# Altium PCB pcb big.PcbDoc (part 2 of 5)
Units mil, origin at the board's own origin, x right, y up, seen from the top; angles counter-clockwise.
Board outline 4068 x 10796 mil, 6 copper layers (TopLayer, MidLayer1, MidLayer2, MidLayer3, MidLayer4, BottomLayer); 521 components, 260 nets, 1284 pads, 1180 vias.
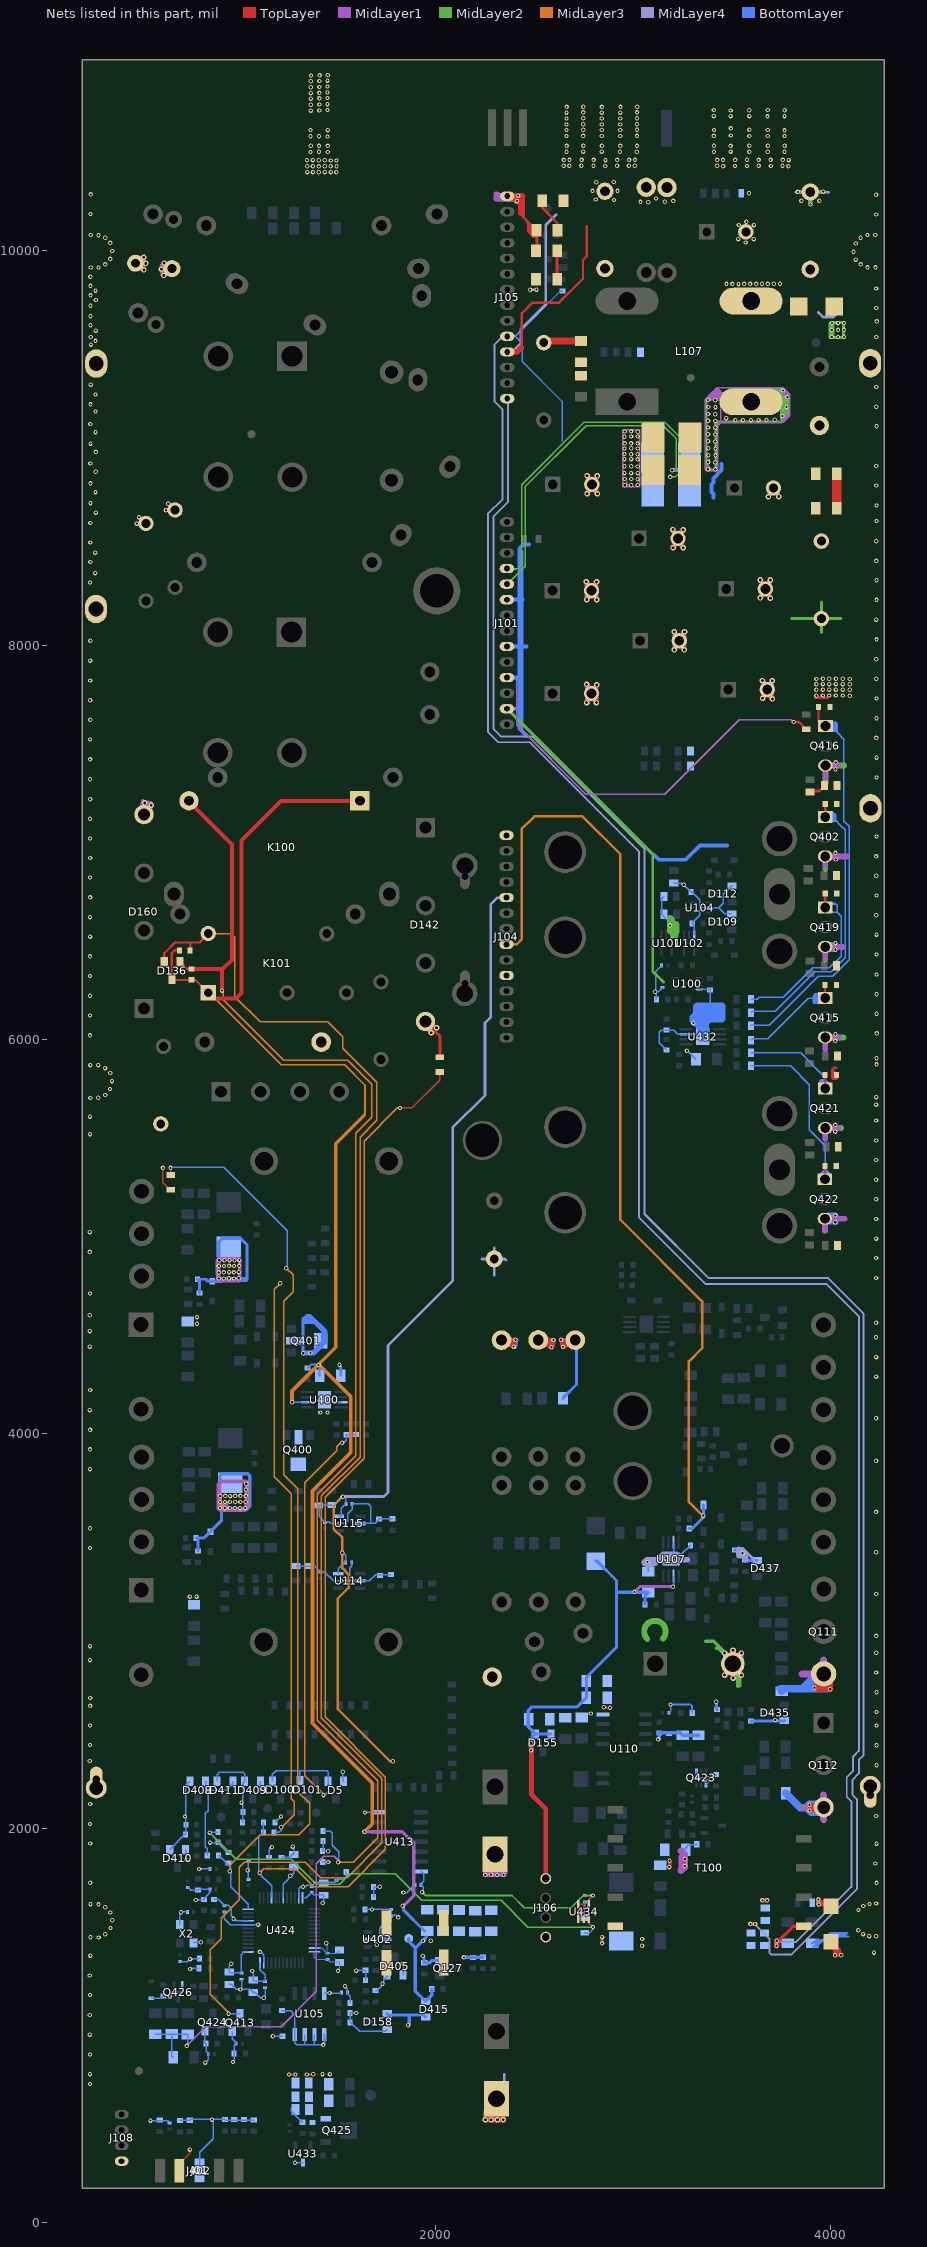
[diagram p6: the nets of this part, all layers, seen from the top]

## Via types
v1: diameter 22, hole 11, TopLayer to BottomLayer, 1101 vias
v2: diameter 28, hole 14, TopLayer to BottomLayer, 79 vias

## Nets (pads, with @x,y where several pads share a name; then routed paths per layer and width w, separated by ;. In a path a pad name is that pad's centre, name@x,y a point inside that pad or via, vN(x,y) a via of type N, cw(c..) or ccw(c..) an arc to the next point about the centre after c; other vN are vias at no path point) (continued)
UnNamedNet7: C101.1 C106.2 C107.1 C112.2 C115.1 C118.2 C122.1 C126.1 C130.1 C139.2 C150.2 C180.2 C213.2 C224.2 C225.2 C226.2 C228.2 C229.2 C230.2 C231.2 C234.2 C508.1 C527.2 C536.2 C537.2 C545.2 C582.2 C583.2 C585.2 C590.2 C5290.2 D109.1 D112.1 J101.2 J101.4 J101.6 J101.9 J101.11 J105.5 Q402.3 Q415.3 Q416.3 Q419.3 Q421.3 Q422.3 R107.2 R117.2 R129.1 R503.2 R504.2 R505.2 R506.2 R507.1 R508.1 R524.2 R525.2 R534.1 R5000.1 RT403.2 T100.6 U100.4 U101.3 U102.3 U104.2 U432.3 U432.9 | length 30269.2
  TopLayer w12: v2(3687,8753) 3687,8773 C228.2@3712,8798 3739,8771 v2(3739,8754) ; v1(3815,7611) 3842,7611 3871,7582 3871,7581 RT403.2@3878,7574 ; v1@3925,7736 3928,7733 3984,7733 v1@3990,7739 ; 4017,5808 4017,5833 4021,5837 ; 4032,5856 4021,5856 4011,5846 4011,5806 4016,5801 4034,5801
  TopLayer w16: v1(3729,1428) 3740,1428 3814,1502 T100.6@3865,1502
  TopLayer w22: v1(3656,1633) v1(3681,1633)
  TopLayer w28: v2(2763,8322) v2(2816,8231) ; v2(2764,7709) v2(2816,7799) ; v2(2764,7801) v2(2814,7709) ; v2(2765,8232) v2(2815,8321) ; v2(2767,8769) v2(2818,8859) ; v2(2767,8860) v2(2819,8768) ; v2(3202,8587) v2(3255,8495) ; v2(3203,8495) v2(3254,8586) ; v2(3209,7976) v2(3261,8068) ; v2(3209,8068) v2(3260,7976) ; v2(3645,8240) v2(3697,8331) ; v2(3645,8331) v2(3697,8239) ; v2(3656,7821) v2(3707,7728) ; v2(3657,7731) v2(3706,7820) ; v1@3729,1404 v1(3729,1428)
  MidLayer1 w7: J101.4@2360,7836 2395,7836 2409,7822 2409,7596 2760,7245 3161,7245 3539,7623 3803,7623 v1(3815,7611) ; 2968,8832 2968,8820 v1@2983,8805 ; v1@2983,8805 2949,8805 2948,8806 2948,9093 2949,9094 2953,9094 3031,9094 3035,9090 3035,8807 3033,8805 v1@2983,8805
  MidLayer1 w18: v2@2763,8234 v2(2763,8322) ; v2(2764,7709) v2(2764,7801) ; v2@2815,8232 v2(2815,8321) ; v2@2816,7711 v2(2816,7799) ; v2(2818,8859) v2(2767,8769) 2787,8829 v2(2767,8860) v2(2819,8768) ; v2(3209,7976) v2(3209,8068) ; v2@3261,7977 v2(3261,8068) ; v2(3645,8240) v2(3697,8331) ; v2(3645,8331) v2(3697,8239) ; v2(3656,7821) C229.2@3681,7775 v2(3657,7731) ; v2(3687,8753) C228.2@3712,8798 v2(3739,8754) ; v2(3706,7820) 3706,7800 3692,7786 3692,7743 v2(3707,7728)
  MidLayer1 w20: v2(3202,8587) v2(3255,8495) ; v2(3203,8495) v2(3254,8586)
  MidLayer1 w30: 3973,5030 Q422.3@3973,5091 4073,5091 ; 3975,5498 Q421.3@3975,5551 4043,5551 ; 3975,5952 Q415.3@3975,6011 4042,6011 ; 3975,6412 Q419.3@3975,6470 4061,6470 ; 3975,6882 Q402.3@3975,6929 4085,6929 ; 3976,7332 Q416.3@3976,7390 4039,7390
  MidLayer2 w8: J101.11@2360,8389 2362,8387 2411,8387 2435,8411 2435,8814 2753,9132 3161,9132 3238,9055 3238,8878 3214,8854 v1(3189,8854)
  MidLayer2 w14: J101.2@2362,7678 3100,6940 3100,6429 3100,6346 3155,6291
  MidLayer2 w15: J101.2@2360,7678 J101.2@2362,7678 ; 3805,8135 C180.2@3955,8135 ; 3955,8066 C180.2@3955,8135 ; 3955,8220 C180.2@3955,8135 ; 4055,8135 C180.2@3955,8135
  MidLayer2 w30: 3215,6524 3188,6551 3188,6617 3198,6607 3198,6569 3221,6546 3221,6583.23 3218.23,6586 ; 3973,5030 Q422.3@3973,5091 4033,5091 ; 3975,5498 Q421.3@3975,5551 4055,5551 ; 3975,5954 Q415.3@3975,6011 4068,6011 ; 3975,6407 Q419.3@3975,6470 4056,6470 ; 3975,6864 Q402.3@3975,6929 4045,6929 ; 3976,7298 Q416.3@3976,7390 4070,7390
  MidLayer3 w18: v2(2763,8322) v2(2816,8231) ; v2(2764,7709) v2(2816,7799) ; v2(2764,7801) v2(2814,7709) ; v2(2765,8232) v2(2815,8321) ; v2(2767,8769) v2(2818,8859) ; v2(2767,8860) v2(2819,8768) ; v2(3202,8587) v2(3255,8495) ; v2(3203,8495) v2(3254,8586) ; v2(3209,7976) v2(3261,8068) ; v2(3209,8068) v2(3260,7976) ; v2(3645,8240) v2(3697,8331) ; v2(3645,8331) v2(3697,8239) ; v2(3656,7821) v2(3707,7728) ; v2(3657,7731) v2(3706,7820) ; v2(3687,8753) 3718,8806 v2(3739,8754)
  MidLayer4 w10: J105.5@2362,9567 2339,9567 2298,9526 2298,9236 2337,9197 2337,8739 2264,8666 2264,7561 2317,7508 2475,7508 3031,6952 3031,5096 3368,4759 3982,4759 4145,4596 4145,2392 4116,2363 4116,2290 4084,2258 4084,2159 4107,2136 4107,1702 3826,1421 3736,1421 v1(3729,1428) 3729,1404 v1(3728,1403) ; v1(3656,1633) v1(3681,1633)
  BottomLayer w7: R107.2@2632,9797 R107.2@2643,9797 ; C536.2@3169,5946 3169,5947 3133,5983 3133,6036 3143,6046 3207,6046 3225.82,6027.18 U432.3@3268,6027.18 U432.9@3332.18,6027.18 ; C150.2@3207,6794 3247,6794 3292,6749 3297,6749 3338,6708 3338,6631 3300,6593 C130.1@3300,6589 3310,6579 U102.3@3310,6532 ; v1(3273,5943) 3275,5943 3318,5900 C508.1@3319,5900 ; U100.4@3337,6253.94 3389.06,6253.94 R117.2@3391,6252 3391,6142 ; 3340,6669 U104.2@3378,6669 3434,6669 ; D109.1@3501,6637 3466,6637 3434,6669 ; D112.1@3502,6779 3500,6779 3458,6737 3458,6692 3435,6669 3434,6669
  BottomLayer w8: R107.2@2632,9797 2405,9570 2365,9570 J105.5@2362,9567 2403,9567 2438,9532 2438,9439 2640,9237 2640,9153 2640,9034 ; R129.1@3118,6204 3117,6205 3117,6238 v1(3113,6242) ; C107.1@3145,6376 3145,6375 3116,6346 3116,6245 v1(3113,6242) ; C112.2@3150,6265 3150,6263 3129,6242 v1(3113,6242) ; C122.1@3156,6725 3145,6714 3145,6634 3187,6592 v1(3187,6579) 3196,6570 U101.3@3196,6533
  BottomLayer w20: J101.2@2360,7678 2435.38,7678 ; J101.4@2360,7836 2425,7836 ; J101.6@2360,7994 2460,7994 ; J101.9@2360,8231 2439.5,8231 ; 2435,7582 2435,8475 ; 2462,7540 2424,7578 2424,8490 2445,8511 2472,8511 ; 3107,6937 3132,6912 3267,6912 3339,6984 3476,6984
  BottomLayer w30: U432.9@3353,6015 3343,6025 3343,6057 3311,6089 3308,6089 3302,6095 3302,6113 3320,6131 3320,6168 3324,6172 3452,6172 3454,6170 3454,6105 3450,6101 3388,6101 3369,6082 3369,6022 3357,6010 3357,6062 3326,6093 3326,6103 3346,6123 3346,6156 3354,6148 3439,6148 3439,6126 3423,6142 3379,6142 3344,6107 3344,6104 3348,6100 3348,6088 3368,6108 3373,6108 3385,6120 3451,6120 ; Q419.3@3975,6470 3985,6480 4021,6480 4024,6483 4024,6459 4023,6458 3984,6458 Q419.3@3983,6459 ; Q422.3@4003,5089 4006,5089 4018,5077 4024,5077 4023,5076 3976,5076 3975,5077 3975,5094 3989,5108 v1(4026,5108) v1(4026,5073)
  other v1: 4026,5533 4026,5567 4026,5993 4027,6027 3306,6083 4027,6455 4027,6489 3257,6785 4028,6913 4027,6947 4027,7371 4028,7406 3930,7744 4099,7744 3963,7745 3995,7745 4029,7745 4064,7745 3930,7774 4099,7774 3963,7775 3995,7775 4029,7775 4064,7775 3930,7802 4099,7802 3963,7803 3995,7803 4029,7803 4064,7803 3930,7829 4099,7829 3963,7830 3995,7830 4029,7830 4064,7830 2958,8812 2991,8812 3024,8813 3023,8842 2958,8843 2991,8843 2957,8873 2990,8873 3024,8873 3024,8907 2957,8908 2991,8908 3023,8943 2957,8944 2990,8944 2990,8969 3023,8969 2957,8970 2957,8998 3024,8998 2991,8999 2958,9024 2990,9024 3023,9024 2957,9058 2990,9059 3023,9059 3024,9083 2958,9084 2990,9085
UnNamedNet8: C1.2 C2.2 C53B.2 C100.1 C102.1 C105.1 C108.2 C110.2 C116.2 C119.2 C121.1 C123.2 C124.2 C125.1 C127.2 C132.1 C134.1 C141.2 C143.1 C144.1 C148.1 C149.2 C151.1 C152.1 C153.1 C154.2 C155.1 C157.1 C160.2 C167.2 C169.2 C170.1 C184.1 C185.1 C210.1 C211.1 C212.1 C215.1 C239.2 C250.2 C251.2 C255.1 C256.1 C400.1 C401.1 C402.1 C403.1 C404.2 C405.2 C406.1 C410.2 C411.2 C412.1 C417.2 C420.1 C422.1 C423.1 C424.1 C425.2 C426.1 C427.1 C428.1 C429.1 C436.2 C437.2 C448.1 C454.2 C456.1 C458.1 C459.1 C510.1 C511.1 C534.1 C535.2 C540.2 C541.2 C549.1 C550.2 C552.1 C554.2 C555.1 C1250.2 C4330.1 C5480.1 C5560.2 CAP1.2 CAP2.2 D5.1 D100.1 D101.1 D111.2 D137.2 D142.4 D158.1 D160.4 D405.1 D408.1 D409.1 D410.1 D411.1 D415.1 D432.2 D433.2 D435.2 D437.2 D438.2 J104.5 J104.7 J104.14 J106.4 J402.4 Q111.3 Q112.3 Q127.2 Q400.2 Q400.4 Q401.2 Q401.4 Q413.2 Q423.1 Q423.4 Q424.2 Q426.2 R5.2 R101.1 R128.1 R135.1 R137.2 R138.2 R151.1 R153.2 R154.1 R156.1 R160.2 R167.1 R182.1 R193.1 R196.1 R242.1 R243.1 R244.2 R245.2 R427.2 R441.1 R442.2 R443.2 R444.2 R456.1 R469.1 R491.2 R538.1 R545.1 R549.2 R550.1 R559.2 R572.2 R1580.1 R1860.1 R2650.1 RT401.2 RT402.1 T100.5 U105.1 U105.2 U105.3 U105.4 U107.3 U107.9 U110.12 U114.2 U115.2 U400.3 U400.9 U402.2 U413.7 U424.8 U424.23 U424.35 U424.47 U433.3 U434.1 U434.2 U434.5 X2.2 X2.4 | length 38739.5
  TopLayer w8: v1(615,5349) 615,5273 650,5238 RT401.2@654,5238 ; J402.4@698,261 698,297 752,351 v1(752,369) ; v1(1255,750) v1(1288,750) ; U434.1@2723,1540 U434.5@2723,1613 2745,1613 2749,1609 U434.2@2749,1540
  TopLayer w12: v1(2851,2613) 2854,2610 v1(2883,2610)
  TopLayer w15: D142.4@1940,6087 1940,6081 1975,6046 v2@1975,6040 ; v2@1992,6063 1964,6091 D142.4@1947,6091 2020,6018 RT402.1@2020,5910 ; v2@2000,6065 v2@1975,6040 ; v2(2003,6060) 2003,6050 1987,6034 v2(1976,6034) 1970,6040 v2@1975,6040
  TopLayer w18: v1@3185,1803 v1(3185,1834) ; 3899,2102 Q112.3@3959,2102 ; v1(3895,2089) 3951,2089 Q112.3@3967,2105 3954,2118 v1(3895,2118) v1(3895,2089)
  TopLayer w22: v2(523,7200) D160.4@519,7141 v2(556,7189) ; D160.4@535,7175 D160.4@535,7186 ; 2382,4459 v1(2403,4477) ; C134.1@2519,4476 v1(2596,4476) v1(2586,4439) 2519,4472 2579,4460 ; C102.1@2660,4463 v1(2635,4477) ; v1(2403,4477) v1(2394,4442) C105.1@2333,4475 v1(2403,4477) ; v1(2635,4477) v1(2645,4440) C102.1@2707,4475 v1(2635,4477)
  TopLayer w28: v2(2251,520) v2(2341,520) 2328,621 2252,524 2275,631 2277,537 2319,538 2287,634 CAP2.2@2290,544 ; v2(3464,2776) v2(3550,2888) ; v2(3464,2888) v2(3550,2775) ; v2(3507,2902) v2(3508,2761) ; 3951,2714 3951,2775 3955,2779 3955,2775 3984,2746 3984,2723 3983,2722 3977,2722 3966,2733 Q111.3@3966,2743 ; Q111.3@3952,2787 3929,2764 3929,2713 3938,2704 v1(4000,2704) 4000,2749 Q111.3@3967,2782
  MidLayer1 w20: v2@532,7191 v2(523,7200) 519,7152 555,7199 514,7209 504,7152 526,7131 v2(556,7189) ; v1(930,3654) 945,3614 ; D142.4@1944,6096 1960,6096 1996,6060 v2(2003,6060) ; D142.4@1952,6092 1952,6060 1976,6036 v2(1976,6034) ; v1(2250,1762) 2347,1761 2352,1775 2334,1889 2265,1889 2251,1768 2258,1889 2266,1781 2340,1778 2278,1776 ; v2(2251,520) v2(2341,520) 2340,651 2257,528 2263,617 2314,636 2324,533 2264,544 2280,529 CAP2.2@2318,573 ; CAP1.2@2304,1794 CAP1.2@2306,1877 ; 2386,4460 2372,4468 2403,4471 2392,4443 2327,4485 v1(2403,4477) ; 2591,4451 2553,4468 2596,4469 2583,4440 2511,4485 v1(2596,4476) ; v1(2635,4477) 2706,4479 2649,4441 v1@2636,4474 ; v1(2645,4440) v1@2636,4474 ; 2658,4458 2667,4470 v1@2636,4474 ; v2(3464,2776) v2(3550,2888) ; v2@3470,2883 v2(3550,2775) ; v2(3507,2902) v2(3508,2761) ; 945,3614 902,3615 896,3622 896,3743 910,3757 1035,3756 1039,3749 1039,3622 1028,3614 945,3614 ; 893,4831 894,4780 896,4775 1002,4777 1005,4782 1005,4879 999,4886 898,4886 893,4877 893,4831
  MidLayer1 w35: 3857,2782 Q111.3@3967,2782 ; 3885,2105 Q112.3@3967,2105 ; 3967,2046 Q112.3@3967,2105 ; 3967,2166.97 Q112.3@3967,2105 ; 3967,2709 Q111.3@3967,2782 ; 3967,2852 Q111.3@3967,2782
  MidLayer2 w18: 3370,2948 3410,2948 3542,2816 3542,2721 ; 3422,2912 3433,2912 3530,2815 3530,2719
  MidLayer2 w30: 3072,2959 cw(c3111,2997) 3152.4,2961.63
  MidLayer3 w7: v1(1210,4764) 1210,4761 1181,4732 1181,3782 1266,3697 1266,2149 1281,2134 1281,2067 1218,2004 v1(1215,2004) ; v1(1430,2167) 1430,2171 1335,2266 1335,3752 1497,3914 1497,3934 1518,3955 v1(1524,3955)
  MidLayer3 w13: J104.7@2358,6483 2410,6483 2435,6508 2435,7068 2499,7132 2743,7132 2935,6940 2935,5086 3350,4671 3350,4434 3283,4367 3283,3654 3352,3585 v1(3356,3585)
  MidLayer3 w18: D160.4@523,7145 v2(523,7200) ; D160.4@530,7156 556,7182 v2(556,7189) ; v1(906,3685) 906,3649 940,3615 ; D142.4@1963,6061 1964,6060 D142.4@1978,6060 ; v2(2003,6060) D142.4@1978,6060 ; CAP1.2@2249,1849 v1(2250,1762) v1(2343,1763) 2321,1849 2259,1770 2329,1778 2317,1834 2290,1786 CAP1.2@2265,1786 ; CAP2.2@2305,614 2276,549 2328,547 2337,533 2256,532 2299,633 2254,612 v2(2251,520) v2(2341,520) 2343,617 CAP2.2@2307,627 ; 2395,4456 2373,4466 v1(2403,4477) ; 2580,4457 2550,4466 v1(2596,4476) ; 2653,4457 2670,4465 v1(2635,4477) ; v2(3464,2888) v2(3550,2775) ; 940,3615 914,3615 903,3626 903,3754 909,3760 1036,3760 1043,3753 1043,3625 1033,3615 940,3615 ; D142.4@1978,6060 1976,6058 v2(1976,6034) 1947,6063 D142.4@1947,6091 D142.4@1978,6060 ; v1(2403,4477) 2393,4443 2331,4478 v1(2403,4477) ; v1(2596,4476) v1(2586,4439) C134.1@2519,4476 v1(2596,4476) ; v1(2635,4477) v1(2645,4440) C102.1@2707,4475 v1(2635,4477)
  MidLayer3 w28: 3871,2105 Q112.3@3967,2105 3967,2039 ; 3875,2782 Q111.3@3967,2782 ; 3967,2709 Q111.3@3967,2782 ; 3967,2849 Q111.3@3967,2782
  MidLayer4 w14: 2234,4887 C417.2@2296,4887 ; 2296,4805 C417.2@2296,4887 ; 2296,4943.99 C417.2@2296,4887 ; CAP2.2@2313,695 2260,695 2255,700 2255,687 2268,674 2268,684 2266,682 2266,561 2268,563 CAP2.2@2347,563 ; CAP2.2@2323,659 2347,683 2347,751 ; 2355,4881 2349,4887 C417.2@2296,4887 ; 3551.98,3419.98 3555,3419.98 3615,3359.98 3615,3351
  MidLayer4 w30: 3162,3347 3163,3348 3218,3348 3229,3359 3229,3377 3219,3387 3153,3387 3107,3341 3097,3341 3095,3339 3065,3339 3059,3345 3059,3349 3071,3361 3275,3361 ; 3552,3382 3538,3382 3538,3413 3569,3382 3569,3363
  BottomLayer w6: U424.35@1384,1392.15 1419.85,1392.15 1446,1366 1496,1366 C552.1@1511,1381 ; v1(1444,1416) 1450,1410 C549.1@1450,1365
  BottomLayer w7: v1(552,516) 640,516 649,507 C427.1@649,505 ; D438.2@556,1136 606,1136 R572.2@619,1149 645,1149 v1(649,1145) 672,1168 705,1168 713,1176 Q426.2@713,1203 ; D410.1@650,1891 732,1973 732,2217 D408.1@752,2237 ; X2.4@701,1510 701,1567 709,1575 C555.1@739,1575 ; C554.2@703,1323 739,1323 752,1336 798,1336 C412.1@800,1338 ; C405.2@741,1699 743,1699 757,1685 R427.2@793,1685 797,1689 852,1689 C400.1@853,1688 853,1671 819,1637 784,1637 v1(782,1635) ; X2.2@770,1417 774,1421 v1(807,1421) ; v1(799,1792) 800,1793 C401.1@854,1793 ; Q424.2@828,971 828,912 835,905 835,868 845,858 C534.1@845,853 845,824 831,810 v1(830,810) ; v1(854,1926) 893,1926 942,1877 C426.1@948,1877 ; D411.1@890,2237 890,2271 902,2283 1021,2283 1029,2275 1029,2238 1019,2228 1019,2085 C211.1@1022,2082 1019,2079 R167.1@1019,2028 ; C5560.2@928,1575 927,1574 927,1540 957.2,1509.8 U424.8@1048,1509.8 1097.8,1509.8 v1(1098,1510) ; C541.2@952,1207 963,1207 988,1182 1058,1182 C540.2@1074,1166 1081,1166 1108,1139 v1(1127,1139) 1133,1145 1133,1189 C550.2@1132,1190 ; Q413.2@967,968 967,931 987,911 C4330.1@987,908 977,898 977,819 v1(971,813) ; v1(1008,1181) 1014,1187 C53B.2@1014,1233 ; C424.1@1049,1740 1049,1831 C425.2@1050,1832 ; v1(1107,1372) 1112,1372 1126.69,1357.31 U424.47@1126.69,1316 ; C511.1@1154,1851 1155,1852 1155,1893 1165,1903 v1(1168,1903) ; D100.1@1171,2238 1171,2272 1189,2290 1447,2290 1454,2283 1454,2184 1437,2167 v1(1430,2167) ; C108.2@1179,1978 1203,1978 1215,1990 v1(1215,2004) ; C510.1@1217,1851 1258,1851 1280,1873 1280,1900 v1(1274,1906) ; R559.2@1219,1074 1263,1074 1285,1052 1285,953 U105.4@1284,952 1284,910 1293,901 1428,901 v1(1429,900) v1@1434,905 ; 1267,582 1267,564 1323,508 R550.1@1324,508 ; v1(1285,302) 1286,303 U433.3@1326,303 ; R242.1@1291,3329 1292,3328 1385,3328 C255.1@1415,3298 1437,3298 1481,3254 1662,3254 1694,3286 R182.1@1772,3286 ; U424.23@1303.85,1646 1303.85,1691.85 1314,1702 1337,1702 1344,1709 1365,1709 C5480.1@1370,1704 1370,1706 1389,1725 1434,1725 1486,1725 1501,1740 1531,1740 1545,1754 R441.1@1545,1778 ; D101.1@1310,2240 1310,2290 ; 1334,901 U105.3@1334,952 ; 1384,901 U105.2@1384,952 ; R549.2@1428,1935 1428,1888 C1250.2@1424,1884 1452,1884 v1(1454,1882) ; R245.2@1472,3639 1470,3637 R244.2@1406,3637 1407,3636 1407,3582 1437,3552 C256.1@1437,3551 1439,3553 1459,3553 1465,3547 1539,3547 1552,3560 1552,3595 1575,3618 C250.2@1575,3645 1657,3645 1669,3633 1669,3546 1670,3545 ; v1(1524,3955) 1532,3955 1545,3968 C410.2@1545,3995 1593,3995 C411.2@1595,3997 ; v1(1539,1198) 1551,1186 1551,1161 1565,1147 R153.2@1565,1113 ; 1562,3259 1562,3319 1573,3330 C251.2@1573,3348 ; v1@1598,1279 C454.2@1643,1279 C437.2@1643,1228 ; U115.2@1617,3545 1691,3545 1714,3568 1779,3568 R135.1@1780,3569 ; v1(1640,2079) 1641,2080 U413.7@1710,2080 ; R444.2@1641,1587 1771,1587 C459.1@1772,1586 ; U402.2@1655,1435 1678,1435 1700,1413 v1(1700,1408) ; R442.2@1684,1651 R443.2@1684,1701 1714,1701 v1(1715,1702) ; v1(1830,1313) 1835,1308 1835,1258 D405.1@1832,1255 ; v1(1835,1673) 1851,1673 1889,1711 C403.1@1893,1711 ; v1(3074,3350) 3077,3347 C170.1@3077,3301 ; U107.3@3205.18,3450 3205.18,3377.18 U107.9@3193,3365 3220,3392 3248,3392 3289,3433 R193.1@3292,3433
  BottomLayer w8: R101.1@2755,1543 2755,1576 v1(2749,1582) 2756,1589 2756,1625 C116.2@2757,1626 ; C119.2@3182,2585 3192,2595 3192,2625 v1(3190,2627) 3293,2627 3299,2621 3299,2585 R491.2@3300,2584 ; Q423.1@3321,2290 3321,2260 3326,2255 3384,2255 v1@3387,2252 ; Q423.4@3371,2219 3371,2221 3383,2233 3383,2251 3403,2271 R538.1@3421,2271
  BottomLayer w9: U400.9@1459.18,4160.82 U400.3@1520,4160.82
  BottomLayer w10: v1@1434,905 U105.1@1434,952
  BottomLayer w11: v1(1511,4350) 1517,4344 1517,4296 C239.2@1518,4295
  BottomLayer w12: D160.4@519,7141 526,7141 D160.4@530,7145 ; v2(523,7200) 523,7152 D160.4@530,7145 ; v2(556,7189) 556,7171 D160.4@530,7145
  BottomLayer w15: R154.1@800,4714 800,4774 C167.2@790,4784 832,4784 842,4774 D432.2@865,4774
  BottomLayer w16: R156.1@793,3405 793,3462 C169.2@783,3472 825,3472 912,3559 912,3616 905,3623 905,3789 913,3797 1047,3797 1056,3788 1056,3633 1043,3620 918,3620 ; D432.2@865,4774 909,4774 912,4777 1036,4777 1042,4783 1042,4958 1008,4992 915,4992 898,4975 v1@898,4783 ; v1@905,4787 1030,4787 ; Q401.2@1278,4472 1309,4472 1325,4456 ; Q401.2@1312,4471 1312,4479 1319,4486 ; 1332,4565 1376,4565 ; v1@1333,4414 1376,4414 1426,4464 1426,4522 1373,4575 1373,4580 1367,4574 1345,4574 ; 1336,4575 1336,4579 1343,4586 1360,4586 ; D158.1@1753,1058 1759,1052 1937,1052 D415.1@1948,1041 ; v1(1859,1000) 1865,1006 1865,1052 ; v1(1933,1351) 1939,1345 1939,1319 R2650.1@1941,1317 1969,1317 1981,1329 Q127.2@2019,1329 ; D142.4@1982,6064 1976,6058 v2@1976,6039 ; v2(2003,6060) v2@1997,6060 ; v1(2142,1344) 2143,1345 R128.1@2239,1345 ; C105.1@2333,4475 2336,4486 2411,4479 2403,4437 2369,4453 2333,4472 2396,4469 2396,4451 2366,4466 2389,4464 ; v1@2592,4467 2535,4472 2538,4465 2586,4450 2602,4478 2592,4436 2568,4448 2540,4451 2520,4474 C134.1@2539,4486 ; R5.2@2645,4180 2645,4182 2713,4250 2713,4469 C102.1@2707,4475 2694,4462 v1(2645,4440) ; C102.1@2669,4468 2651,4465 2649,4455 2686,4469 2647,4442 v1(2635,4477) C102.1@2705,4477 ; C110.2@3285,3519 3299,3519 3358,3578 D137.2@3358,3639 ; v1(3422,2641) 3424,2639 3424,2603 C157.1@3426,2601 ; C155.1@3516,3410 3540,3410 3569,3381 R1580.1@3569,3359 3571,3357 D437.2@3629,3357 ; R160.2@3599,2543 3765,2543 D435.2@3767,2545 ; 1325,4456 1325,4581 1344,4600 1364,4600 1442,4522 1442,4463 1384,4405 1329,4405 1325,4409 1325,4456 ; v2@1976,6039 v2@1997,6060 ; v2@1976,6039 v2(1976,6034) 1947,6063 D142.4@1947,6091 1950,6094 1963,6094 v2@1997,6060 ; C134.1@2539,4486 v1(2596,4476) C134.1@2539,4486
  BottomLayer w18: v1(3127,2450) 3133,2456 C535.2@3133,2483 3240,2483 R1860.1@3252,2471 3331,2471 R151.1@3332,2470 ; v2(3464,2776) 3550,2862 v2(3550,2888) ; v2(3464,2888) 3464,2861 v2(3550,2775) ; v2(3507,2902) 3507,2762 v2(3508,2761)
  BottomLayer w38: C154.2@3754,2694 3754,2700 3747,2707 3858,2707 3940,2789 Q111.3@3981,2789 ; C160.2@3775,2177 3848,2104 3963,2104 Q112.3@3968,2099 ; 3845,2707 3986,2707 3994,2715 3994,2772 3991,2775 3958,2775 3915,2732 3964,2732 3970,2726 Q111.3@3970,2748 ; 3863,2104 3880,2104 3904,2080 Q112.3@3956,2080 ; v1@3892,2119 3895,2122 3953,2122 3966,2109 3966,2108 3969,2105 Q112.3@3967,2105
  other v1: 1425,752 1462,752 1596,1277 753,1335 3046,1403 3046,1437 707,1573 1676,1587 1326,1702 2310,1762 2280,1763 1045,1786 3184,1802 727,2059 1014,2129 3379,2254 3721,2548 2785,2581 3920,2712 752,3174 786,3174 1520,3254 3167,3367 3215,3367 3556,3394 1512,3545 929,3623 1006,3623 1033,3623 905,3624 955,3624 981,3624 905,3654 955,3654 982,3654 1008,3654 1035,3654 956,3684 931,3685 982,3685 1008,3685 1036,3685 1037,3716 1038,3747 1414,4108 1450,4108 1327,4409 1363,4410 788,4558 788,4592 898,4788 924,4788 975,4788 950,4789 1000,4789 898,4819 924,4819 975,4819 950,4820 1000,4820 899,4851 925,4851 976,4851 951,4852 1001,4852 901,4880 927,4880 978,4880 953,4881 1003,4881
  other v2: 2280,520 2312,520
UnNamedNet9: C426.2 R170.2 RT401.1 U424.12 | length 4724.9
  TopLayer w8: v1(654,5349) 655,5349 RT401.1@655,5312
  MidLayer3 w7: v1(954,1781) 954,1811 1108,1965 1304,1965 1360,2021 1360,2125 1300,2185 1300,3720 1228,3792 1228,4673 1276,4721 1276,4806 1242,4840 v1(1241,4840)
  BottomLayer w7: v1(654,5349) 658,5353 924,5353 1246,5031 1246,4845 v1(1241,4840) ; R170.2@898,1861 899,1861 958,1802 958,1703 1048,1613 U424.12@1048,1588.54
UnNamedNet10: C108.1 R104.1 RT402.2 U424.16 | length 5535.7
  TopLayer w8: v1(1818,5653) 1878,5653 2019,5794 2019,5835 RT402.2@2020,5836
  MidLayer3 w7: v1(1106,1773) 1107,1773 1127,1793 1289,1793 1379,1703 1555,1703 1744,1892 1744,2259 1439,2564 1439,3679 1636,3876 1636,5485 1804,5653 v1(1818,5653)
  BottomLayer w7: R104.1@1126,2029 1125,2028 1125,1979 1102,1956 1102,1772 1166.06,1707.94 U424.16@1166.06,1646
UnNamedNet11: C135.2 C136.2 C180.1 C181.1 C193.1 C204.1 C205.1 C206.2 C207.2 C208.2 C223.1 C242.1 C245.1 C300.1 HS2.1 J001.1 J001.2 J003.1 J003.2 J007.1 J008.1 J009.1 J105.14 | length 4812.4
  TopLayer w12: J105.14@2362,10278 ccw(c2388.56,10278) 2369.78,10259.22 ccw(c2370.31,10259.76) J105.14@2370.31,10259 ; J105.14@2367,10272 2436,10272 2438,10270 ; J105.14@2372,10258 2401,10258 2422,10237 2422,10193 2446,10169 ; v1@2421,10257 2414,10264 2408,10264 2424,10248 2424,10246 ; 2432,10187 2432,10258 2422,10268 2370,10268 2435,10268 2441,10262 2441,10180 ; 2446,10280 2446,10169 ; 2452.96,10162.04 cw(c2419.06,10128.14) 2467,10128.14 2467,10101 2497,10071 2512,10071 ; 2470,10135 2470,10128 2501,10097 2501,10079 2505,10075 2504,10075 2475,10104 2475,10116 2499,10092 C193.1@2499,10088 ; C193.1@2510,10105 2446,10169 ; HS2.1@4172,9472 4172,9467 4166,9461 4166,9395 4174,9387 HS2.1@4174,9378
  TopLayer w16: J105.14@2362,10278 2369,10285 2441,10285 2446,10280 ; C223.1@2508,10002 2512,10006 2512,10103 C193.1@2510,10105
  TopLayer w22: v2@516,9957 517,9925 v2(519,9904) C300.1@476,9938 ; v2(518,9968) C300.1@476,9938 ; v2(621,9939) C207.2@661.31,9910.57 ; v2@622,9929 623,9900 v2(619,9876) C207.2@661.31,9910.57 ; C300.1@476,9938 v2(528,9937) C300.1@476,9938 ; C207.2@661.31,9910.57 v2(608,9907) C207.2@661.31,9910.57
  TopLayer w35: C181.1@2547,9535 2555,9543 C242.1@2736,9543
  MidLayer1 w20: C300.1@476,9938 v2(519,9904) ; v1(482,8617) C205.1@529,8618 v1(494,8649) ; v2(518,9968) 472,9940 v2@529,9938 ; v2(621,9939) 609,9923 612,9879 628,9923 617,9883 C207.2@658,9910 ; v1(630,8685) 683,8678 v1(642,8718) ; 2312,10276 2319,10269 J105.14@2389,10269 ; 2404,10267 2384,10267 2378,10261 2340,10261 2337,10264 2302,10264 2302,10290 2304,10292 2310,10292 2320,10282 2416,10282 v1(2417,10281) ; v1@2411,10250 2411,10252 2403,10260 2403,10265 2414,10276 2414,10262 v1@2411,10259
  MidLayer4 w20: v1(494,8649) C205.1@529,8618 ; v1(630,8685) 677,8695 v1(642,8718) ; J105.14@2370,10277 2364,10283 2319,10283 2312,10290 2310,10290 2304,10284 2304,10265 2307,10262 2396,10262 2407,10251 2413,10251 2419,10257 2419,10278 2415,10282 2366,10282 2360,10276 2315,10276 2321,10270 2403,10270
  BottomLayer w10: C206.2@3907,1417 3915,1417 3931,1433 3965,1433 4001,1469 4088,1469 ; C206.2@3913,1400 3933,1400 3960,1426 3978,1439 4001,1448 4033,1451 4092,1450 ; C206.2@3920,1404 3932,1404 3957,1429 3932,1429 3929,1426 3929,1414 3927,1412 3928,1412 C206.2@3940,1424 ; 3988,1449 3990,1449 4005,1464 4083,1464 4084,1463 ; 4002,1455 4079,1455
  BottomLayer w16: C300.1@484,9937 517,9904 v2(519,9904) ; v2(518,9968) 506,9968 C300.1@476,9938 477,9937 v2(528,9937) ; v2(608,9907) 657.74,9907 C207.2@661.31,9910.57 ; v2(619,9876) 626.74,9876 C207.2@661.31,9910.57 ; v2(621,9939) 632.89,9939 C207.2@661.31,9910.57
  BottomLayer w20: J105.14@2362,10278 2364,10280 2420,10280 2420,10259 2412,10251 2401,10262 2362,10262 2353,10271 2405,10271
  other v1: 245,702 245,752 245,851 244,952 244,1052 245,1153 244,1252 247,1353 4222,1368 289,1445 248,1446 4234,1451 4198,1452 323,1461 4167,1462 4143,1482 349,1493 358,1532 348,1572 4144,1584 323,1598 4168,1605 288,1613 248,1614 4199,1615 4233,1617 4235,1722 246,1723 4229,1820 4235,1921 246,1922 245,2021 4234,2061 246,2122 4235,2319 244,2340 4235,2420 245,2421 245,2520 4235,2520 4235,2589 246,2620 246,2660 4235,2689 4233,2789 245,2852 4234,2889 245,2923 4234,2975 4234,3187 4234,3399 245,3421 245,3521 4233,3604 245,3821 4233,3863 245,3921 246,4020 4233,4079 244,4120 246,4222 4233,4290 4233,4389 244,4442 4232,4490 244,4521 4233,4563 244,4601 245,4712 4233,4790 4233,4892 244,4923 4233,4990 244,5023 4233,5090 4233,5190 4233,5289 4234,5389 4234,5488 245,5520 4233,5589 245,5609 4233,5670 247,5703 287,5705 4234,5708 323,5719 347,5749 357,5789 348,5830 322,5855 247,5870 287,5870 4235,5874 4235,5905 245,6021 4236,6031 245,6122 4235,6131 245,6222 4235,6230 245,6322 4235,6330 245,6422 4235,6431 246,6522 4235,6532 245,6621 4234,6630 246,6721 4235,6731 245,6822 4234,6831 246,6921 4233,6929 245,7020 4235,7030 245,7120 246,7219 245,7320 4235,7329 246,7421 4235,7430 245,7522 4234,7530 247,7622 4235,7630 246,7721 4235,7730 246,7821 4234,7830 246,7922 4234,7929 247,8023 4235,8030 4234,8130 4235,8230 245,8318 4235,8330 272,8366 247,8422 4234,8428 272,8470 247,8521 4234,8528 247,8620 4235,8630 274,8673 4235,8709 248,8721 273,8777 4234,8810 248,8821 274,8880 4234,8909 247,8922 274,8981 248,9023 273,9081 4235,9111 247,9122 273,9186 4234,9210 248,9222 273,9272 4234,9310 249,9322 250,9525 273,9544 249,9564 4234,9564 274,9596 248,9623 4236,9643 248,9669 4234,9711 248,9722 275,9751 248,9775 273,9799 4233,9810 248,9823 247,9869 249,9916 288,9916 4189,9917 4230,9917 323,9932 4155,9932 4130,9956 348,9960 4118,9996 358,10000 4130,10038 348,10041 323,10067 4154,10067 288,10080 249,10081 4189,10081 4229,10081 4234,10185 248,10188 2411,10253 4233,10285 249,10287 1406,10399 1495,10399 1347,10400 1376,10400 1436,10400 1467,10400 1406,10429 1347,10430 1376,10430 1436,10430 1466,10430 1496,10430 1467,10459 1496,10459 1346,10460 1406,10460 1436,10460 1376,10461 1364,10502 1451,10502 1407,10503 1407,10533 1451,10533 1365,10534 1450,10581 1364,10582 1407,10582 1451,10613 1364,10614 1365,10712 1409,10713 1450,10715 1365,10742 1409,10743 1450,10745 1365,10773 1409,10774 1450,10776 1365,10801 1409,10802 1450,10804 1365,10831 1409,10832 1450,10834 1365,10861 1409,10862 1450,10864 1366,10890 1410,10891 1451,10893
UnNamedNet12: C244.2 C245.2 | length 173
  TopLayer w48: C245.2@4034,8696 C244.2@4034,8869
UnNamedNet13: C244.1 J101.10 L107.2 R507.2 R508.2 R534.2 R5000.2 | length 7268.7
  MidLayer1 w7: 3382,8916 3382,8909 3405,8886 ; 3397,9255 3411,9255 3437,9281 3437,9254 3434,9251 3391,9251 3387,9247 3430,9290 3433,9290 3442,9281 3442,9249 3438,9245 3377,9245 3429,9297 3429,9302 3446,9285 3446,9131 ; 3404,9257 3425,9278 3425,9280 3430,9275 3430,9268 3421,9259 3416,9259 3417,9258 3432,9258 3431,9259 3431,9301 ; 3435,9123 3435,9129 ; v1@3758,9301 3758,9282 3768,9272 3790,9272 3761,9301 3760,9301 3763,9298 3763,9282 3769,9276 3792,9276 3793,9275 3785,9283 3781,9283 3779,9285 3769,9285 3772,9285 3774,9283 3770,9283 3765,9288 3765,9284 3769,9280 3784,9280 3785,9279 ; 3769,9154 3771,9154 3778,9161 3778,9158 3766,9146 3766,9157 3768,9159 3768,9160 3769,9161 3786,9161 3761,9136 3761,9160 3767,9166 3794,9166 ; 3405,8886 3374,8886 3370,8890 3370,9248 3428,9306 3763,9306 3795,9274 3795,9165 3761,9131 3446,9131 ; 3405,8886 3425,8886 3429,8890 3429,9114 ; 3429,9114 3429,9130 3430,9131 3446,9131 ; 3429,9114 3446,9131
  MidLayer2 w8: J101.10@2360,8310 2362,8310 2453,8401 2453,8805 2762,9114 3153,9114 3220,9047 3220,8900 3208,8888 v1(3199,8888)
  MidLayer2 w15: 3386,8939 3370,8923 3370,8891 ; v1(3417,9104) 3417,9128 3422,9133 3440,9133 ; L107.2@3480,9281 3487,9274 3761,9274 3757,9278 3755,9278 3745,9288 L107.2@3491,9288 ; 3753,9147 3755,9149 3755,9152 3754,9153 3754,9273 ; 3765,9277 3765,9150 3760,9145 3760,9152 3775,9167 3775,9262 3768,9269 ; 3370,8891 3370,9247 3399,9276 3468,9276 3492,9300 3753,9300 3784,9269 3784,9164 3753,9133 3440,9133 ; 3370,8891 3372,8889 3417,8889 3420,8892 3420,9113 3440,9133
  BottomLayer w20: v1(3199,8888) R507.2@3266.99,8888 ; 3407,8749 3407,8767 3397,8777 3397,8816 3407,8826 3407,8846 3449,8888 3449,8919
  other v1: 3417,8892 3381,8893 3417,8927 3381,8928 3418,8963 3382,8964 3418,8998 3382,8999 3417,9034 3381,9035 3417,9069 3381,9070 3381,9105 3417,9138 3381,9139 3519,9141 3557,9142 3598,9142 3637,9142 3677,9143 3719,9144 3473,9152 3758,9163 3417,9172 3381,9173 3418,9208 3778,9208 3382,9209 3417,9243 3381,9244 3783,9258 3760,9293
UnNamedNet15: R101.2 R551.1 U434.3 | length 2342.4
  TopLayer w8: U434.3@2775,1540 2775,1519 2796,1498 v1(2797,1498)
  MidLayer2 w7: v1(853,1977) 988,1842 1265,1842 1392,1715 1512,1715 1564,1767 1793,1767 1927,1633 2332,1633 2467,1498 v1(2797,1498)
  BottomLayer w7: v1(853,1977) 856,1980 R551.1@894,1980
  BottomLayer w8: R101.2@2755,1469 2758,1466 2776,1466 2797,1487 v1(2797,1498)
UnNamedNet16: C53B.1 C116.1 C149.1 C250.1 C251.1 C402.2 C403.2 C422.2 C423.2 C428.2 C429.2 C459.2 C540.1 C541.1 C549.2 C550.1 C552.2 C5480.2 C5560.1 D5.2 D158.2 D405.2 D408.2 D409.2 D410.2 D411.2 J01.3 J104.10 J108.1 Q425.3 R104.2 R150.2 R155.2 R170.1 R171.2 R403.1 R418.2 R461.1 R462.1 R463.1 R464.1 R465.1 R466.1 R467.1 R475.1 R560.1 U105.8 U114.5 U115.5 U402.5 U413.14 U424.1 U424.9 U424.19 U424.24 U424.36 U424.48 U434.4 | length 10038.3
  TopLayer w8: v1(1345,750) v1@1377,750 ; U434.4@2775,1613 2775,1636 2796,1657 v1(2796,1658)
  MidLayer2 w7: v1(1930,1674) 1946,1658
  MidLayer2 w8: 1946,1658 2386,1658 2448,1596 2685,1596 2745,1656 2794,1656 v1(2796,1658)
  MidLayer3 w13: v1(1528,3681) 1527,3681 1481,3635 1481,3518 1525,3474 1525,3319 1557,3287 1557,3219 1502,3164 1502,2603 1766,2339 v1(1781,2339)
  MidLayer4 w13: v1(1528,3681) 1529,3682 1736,3682 1757,3703 1757,4448 2085,4776 2085,5553 2249,5717 2249,6085 2279,6115 2279,6687 2312,6720 J104.10@2358,6720
  BottomLayer w6: U424.36@1384,1372.46 1384,1345 1395,1334 1449,1334 1461,1322 1507,1322 C552.2@1511,1318 1511,1284 v1(1503,1276)
  BottomLayer w7: R461.1@701,517 702,518 R464.1@751,518 757,524 927,524 933,518 1074,518 R463.1@1076,520 ; D410.2@730,1891 730,1841 v1(733,1838) ; v1(753,1285) 757,1289 R403.1@799,1289 ; J01.3@803,264 803,356 871,424 871,514 v1(864,521) ; D408.2@832,2237 832,2197 839,2190 v1(839,2181) ; R170.1@840,1861 839,1862 839,1896 830,1905 830,2075 844,2089 844,2176 v1(839,2181) ; R475.1@874,1638 896,1638 926,1608 947,1608 962,1593 962,1555 987.52,1529.48 U424.9@1048,1529.48 ; v1(962,1312) 952,1302 C541.1@952,1270 957,1265 C53B.1@1014,1265 1012,1267 1012,1358 1026,1372 U424.1@1048,1372 ; D411.2@970,2237 970,2227 936,2193 851,2193 v1(839,2181) ; v1(1068,1275) 1074,1269 C540.1@1074,1229 1081,1222 C550.1@1132,1222 1133,1223 1133,1255 1107,1281 U424.48@1107,1316 ; D409.2@1110,2237 1110,2189 v1(1115,2184) ; v1(1173,944) R418.2@1221,944 ; R104.2@1184,2029 1186,2029 1214,2057 v1(1214,2059) ; U424.19@1225.11,1646 1225.11,1716.11 1280,1771 1280,1802 C423.2@1279,1803 ; U424.24@1323.54,1646 1341,1646 1367,1672 C5480.2@1370,1672 1381,1661 1429,1661 C422.2@1431,1659 1431,1625 v1(1426,1620) ; R171.2@1426,1827 1427,1828 v1(1453,1828) ; U105.8@1434,1162 1517,1162 C149.1@1520,1165 ; U114.5@1505,3291 1505,3316 1543,3354 1543,3384 1530,3397 v1(1525,3397) ; U115.5@1506,3582 1522,3582 1521,3583 1521,3622 1543,3644 1543,3672 1534,3681 v1(1528,3681) ; v1(1527,2286) 1528,2285 1528,2241 D5.2@1532,2237 ; R150.2@1564,1061 1565,1062 v1(1596,1062) ; R150.2@1565,1069 R155.2@1565,1013 1569,1013 1613,969 1744,969 D158.2@1753,978 ; R465.1@1693,1176 1701,1176 1735,1210 1735,1230 1752,1247 D405.2@1752,1255 ; U402.5@1752,1435 1728,1435 1714,1449 1714,1492 1730,1508 1752,1508 1772,1528 C459.2@1772,1554 1776,1558 1798,1558 v1(1809,1547) ; U413.14@1924,1780 1937,1767 1937,1731 1925,1719 C403.2@1925,1711 1936,1700 1936,1680 v1(1930,1674)
  BottomLayer w8: C116.1@2757,1658 2758,1659 2795,1659 v1(2796,1658)
  other v1: 1378,751 1461,1163 1729,1210 973,1540 1261,1758
UnNamedNet17: C101.2 C106.1 C590.1 D145.1 J105.1 | length 10024.4
  TopLayer w18: 4034,1383 4035,1382 4035,1361 ; D145.1@4003,1404 4022,1385 4022,1357 v1(4024,1355) v1(4056,1355) 4046,1365 4046,1382 4004,1424 D145.1@4003,1424 D145.1@4003,1404
  TopLayer w22: v1@3596,1513 v1(3619,1513)
  MidLayer1 w20: v1@3596,1513 v1(3619,1513)
  MidLayer2 w20: v1@3596,1513 v1(3619,1513) ; v1(4024,1355) v1(4056,1355)
  MidLayer4 w10: J105.1@2362,9251 2366,9247 2366,8727 2293,8654 2293,7575 2330,7538 2489,7538 3058,6969 3058,5115 3383,4790 3990,4790 4170,4610 4170,2370 4146,2346 4146,2277 4112,2243 4112,2170 4135,2147 4135,1690 3803,1358 3701,1358 3691,1368 3691,1438 3615,1514 v1(3595,1514)
  MidLayer4 w20: v1(4024,1355) v1(4056,1355)
  BottomLayer w16: v1(4024,1355) v1(4056,1355)
UnNamedNet18: D145.2 R136.2 | length 256.4
  TopLayer w22: v1@3941,1614 v1(3942,1613) 3994,1613 D145.2@4003,1604 4003,1618 3996,1625 3954,1625 v1(3941,1638) v1@3941,1614
  MidLayer1 w20: v1@3941,1614 v1(3941,1638)
  MidLayer2 w20: v1@3941,1614 v1(3941,1638)
  MidLayer4 w10: v1@3941,1604 v1(3941,1638)
UnNamedNet19: C545.1 C584.2 | length 90.3
  TopLayer w15: C584.2@3897,7255 3903,7261 3946,7261 3972,7287 C545.1@3972,7289
UnNamedNet20: C261.1 D136.1 K100.2 R1.1 R517.2 R539.2 R546.2 R573.2 | length 8722.1
  TopLayer w12: D136.1@702,6394 702,6393 738,6357 C261.1@760,6357
  TopLayer w20: K100.2@747,7211 747,7207 965,6989 965,6404 918,6357 C261.1@760,6357 ; v1(915,6248) 915,6354
  MidLayer1 w7: v1(736,895) 736,896 833,993 1215,993 1394,1172 1394,1819 1431,1856 1484,1856 1504,1836 v1(1504,1827)
  MidLayer3 w7: v1(915,6248) 920,6243 920,6201 1227,5894 1552,5894 1674,5772 1674,5605 1594,5525 1594,3889 1398,3693 1398,2548 1705,2241 1705,1951 1580,1826 1513,1826 1512,1827 v1(1504,1827)
  BottomLayer w7: R517.2@576,954 577,953 R539.2@742,953 742,901 v1(736,895) ; R573.2@661,955 661,843 R1.1@667,837 ; R546.2@1428,1985 1465,1985 1473,1977 1473,1914 1507,1880 1507,1830 v1(1504,1827)
UnNamedNet21: C1.1 C2.1 C123.1 C124.1 C141.1 C143.2 C144.2 C148.2 C151.2 C152.2 C153.2 C170.2 C239.1 C260.1 C261.2 D136.3 D143.1 D151.2 D155.1 D155.2 D415.2 J106.1 K100.1 K101.1 R264.1 R492.1 R555.1 R556.1 TP1.1 U107.6 U400.6 | length 11897.8
  TopLayer w10: D136.3@662,6305 664,6303 779,6303 K101.1@845,6237
  TopLayer w12: D136.3@662,6305 660,6307 660,6438 674,6452 C260.1@699,6452
  TopLayer w16: v1(2843,1415) v1(2843,1447)
  TopLayer w18: v1(3262,1808) v1(3262,1842)
  TopLayer w20: K101.1@845,6237 874,6208 987,6208 1014,6235 1014,7010 1215,7211 K100.1@1614,7211
  TopLayer w25: v1(2484,2431) 2484,2171 2557,2098 J106.1@2557,1744
  MidLayer1 w14: v1(3007,3198) 3008,3198 3036,3226 3199,3226 v1(3201,3224)
  MidLayer1 w18: v1(1637,1981) 1638,1982 1829,1982 1887,1924 1887,1656 1837,1606 v1(1831,1606)
  MidLayer1 w35: 3244,1785 3262,1803 3262,1867 3244,1885 ; 3247,1795 3247,1853
  MidLayer3 w9: K101.1@845,6237 851,6237 1216,5872 1537,5872 1640,5769 1640,5620 1636,5616
  MidLayer3 w18: v1(1271,4160) 1270,4161 1270,4217 1492,4439 1492,5472 1636,5616 ; v1(1405,4349) 1408,4349 1567,4190 1567,3904 1374,3711 1374,2532 1676,2230 1676,2020 v1(1637,1981)
  BottomLayer w7: v1@1271.59,4160.59 U400.6@1348,4160.59 ; v1(3201,3224) 3205.41,3228.41 U107.6@3205.41,3278
  BottomLayer w8: C153.2@3267,1891 3267,1900 3282,1915 3320,1915 R492.1@3323,1918
  BottomLayer w11: R556.1@1348,4334 1350,4334 1367,4351 1403,4351 v1(1405,4349) 1410,4344 1410,4296 C239.1@1411,4295
  BottomLayer w16: v1(1831,1606) 1836,1601 1836,1584 C148.2@1942,1478 ; TP1.1@1862,1440 1862,1426 1895,1393 1895,1173 1947,1121 D415.2@1948,1121 1979,1152 R264.1@1979,1183 ; 1897,1393 1950,1446 1952,1446 ; v1(2483,2395) 2484,2396 2484,2457 D155.1@2504,2477 ; D155.2@2584,2477 2583,2478 2504,2478 2468,2514 2468,2596 2487,2615 2716,2615 2763,2662 2763,2764 2916,2917 2916,3256 2818,3354 D151.2@2810,3354 ; 2916,3196 3075,3196 C170.2@3077,3194 3060,3177 R555.1@3060,3134
  other v1: 1935,1428 1974,1428
UnNamedNet22: C136.1 C140.2 C227.1 C232.2 D141.2 L107.3 RT404.2 | length 705.1
  MidLayer2 w18: v1@3837,10301 3886,10301 v1(3965,10301) ; v1@3899,10237 C136.1@3899,10299
  MidLayer4 w13: 3825,10299 C136.1@3899,10299 3992,10299 ; 3940,9688 3965,9663 4015,9663 4039,9687 4026,9687 4011,9672 3980,9672 3990,9682 4014,9682
  MidLayer4 w14: v1(2478,9803) 2509,9803 v1(2510,9804)
  MidLayer4 w20: v1@3899,10237 C136.1@3899,10299
  BottomLayer w12: v1(2478,9803) v1@2509,9803
  other v1: 3535,9832 3474,9833 3504,9833 3564,9833 3594,9833 3625,9833 3683,9833 3654,9834 3714,9834 3745,9834 3571,10043 3534,10060 3612,10060 3613,10131 3537,10132 3575,10148 3900,10236 3854,10255 3945,10255 3588,10293 3836,10300 3457,10430 3788,10430 3517,10431 3578,10431 3699,10431 3427,10432 3637,10432 3758,10432 3789,10461 3427,10462 3456,10462 3518,10462 3637,10462 3698,10462 3759,10462 3578,10463 3411,10503 3590,10503 3683,10503 3768,10503 3495,10504 3495,10533 3411,10534 3590,10534 3684,10534 3769,10534 3590,10583 3683,10583 3768,10583 3409,10584 3496,10586 3768,10612 3411,10614 3683,10614 3590,10615 3496,10622 3682,10683 3409,10684 3495,10684 3590,10684 3768,10684 3495,10713 3589,10714 3769,10714 3410,10715 3683,10715
UnNamedNet23: D141.1 RT100.2 | length 372.3
  MidLayer2 w15: 4006,9587 4015,9563 4016,9563 4019,9560 ; v1@4013,9629 4014,9628 v1@4014,9572 ; 4019,9560 3999,9560 3998,9561 3998,9633 4002,9637 4060,9637 4068,9629 4068,9564 4064,9560 4019,9560
  other v1: 4008,9564 4040,9564 4070,9564 4008,9599 4040,9600 4070,9600 4039,9634 4009,9635 4070,9635
UnNamedNet24: Q416.1 R514.2 R525.1 | length 2569.7
  TopLayer w12: R525.1@3941,7687 3941,7615 3966,7590 Q416.1@3976,7590
  BottomLayer w7: R514.2@3598,6070 3600,6072 3691,6072 3939,6320 4012,6320 4096,6404 4096,7081 4070,7107 4070,7524 4035,7559 ; Q416.1@3966,7581 3982,7565 4029,7565 4035,7559 ; Q416.1@3976,7590 3996,7610 4027,7610 4035,7602 4035,7559 ; Q416.1@3979,7578 4032,7578 ; Q416.1@3979,7587 4031,7587 ; Q416.1@3980,7573 4034,7573 ; Q416.1@3983,7569 4033,7569 ; Q416.1@3983,7592 4032,7592 ; Q416.1@3983,7602 4033,7602 ; Q416.1@3986,7605 4030,7605 ; Q416.1@3987,7597 4034,7597 ; Q416.1@3988,7581 4033,7581
UnNamedNet25: C260.2 D136.2 K101.5 Q413.3 | length 7567.6
  TopLayer w12: D136.2@622,6394 622,6438 676,6492 801,6492 845,6536 K101.5@845,6538 ; C260.2@753,6452 753,6487
  MidLayer3 w7: K101.5@845,6538 847,6536 962,6536 980,6518 980,6217 1108,6089 1452,6089 1528,6013 1528,5955 1700,5783 1700,5590 1615,5505 1615,3881 1419,3685 1419,2560 1726,2253 1726,1925 1549,1748 1416,1748 1337,1827 1028,1827 1003,1802 1003,1636 910,1543 910,1439 854,1383 854,1157 948,1063 v1(948,1058)
  BottomLayer w7: v1(948,1058) 949,1057 Q413.3@1007,1057
UnNamedNet27: Q422.1 R504.1 R512.2 | length 1125.7
  TopLayer w12: Q422.1@3973,5291 3974,5292 3974,5357 R504.1@3973,5358
  BottomLayer w7: R512.2@3598,5866 3799,5866 3894,5771 3894,5543 3975,5462 3975,5358 3975,5293 Q422.1@3973,5291 ; Q422.1@3961,5320 3979,5320 3980,5321 3980,5327 3982,5325 3982,5319 3992,5319 3980,5331 3980,5335 ; 3967,5323 3967,5316 3968,5317 3968,5324 3970,5326 3970,5333 3957,5320 3955,5320 3945,5310 3945,5312 3975,5342 3975,5344 ; 3975,5345 3975,5343 3996,5322 Q422.1@3996,5317
UnNamedNet28: Q421.1 R506.1 R515.2 | length 791.8
  TopLayer w12: R506.1@3974,5821 3975,5820 Q421.1@3975,5751
  BottomLayer w7: R515.2@3598,5932 3850,5932 3975,5807 3975,5796 ; Q421.1@3947,5768 3947,5789 3954,5796 3975,5796 ; 3951,5788 3974,5788 3976,5790 3956,5790 3956,5788 3950,5782 3977,5782 3982,5787 3982,5784 3987,5779 3949,5779 3949,5777 Q421.1@3975,5751 3975,5778 Q421.1@3974,5779 ; Q421.1@3992,5779 3975,5796
UnNamedNet29: Q415.1 R518.2 R524.1 | length 1051.7
  TopLayer w12: R524.1@3974,6277 3974,6212 Q415.1@3975,6211
  BottomLayer w7: R518.2@3599,5997 3605,6003 3682,6003 3889,6210 3974,6210 Q415.1@3975,6211 ; 3913,6210 3913,6220 3924,6231 Q415.1@3965,6231 ; 3915,6210 3915,6190 3920,6185 Q415.1@3956,6185 ; 3916,6216 Q415.1@3972,6216 ; 3917,6197 Q415.1@3973,6197 ; 3917,6202 Q415.1@3968,6202 ; 3918,6192 Q415.1@3970,6192 ; 3918,6221 Q415.1@3982,6221 ; 3919,6207 Q415.1@3978,6207 ; 3923,6225 Q415.1@3976,6225
UnNamedNet30: Q402.1 R505.1 R513.2 | length 1891.9
  TopLayer w12: Q402.1@3975,7129 R505.1@3975,7195
  BottomLayer w7: R513.2@3599,6137 3605,6143 3722,6143 3922,6343 4005,6343 4076,6414 4076,7024 4076,7064 4052,7088 4028,7112 ; Q402.1@3975,7129 3981,7135 3982,7135 4023,7135 ; Q402.1@3977,7140 4023,7140 ; Q402.1@3978,7148 4016,7148 ; Q402.1@3979,7112 4028,7112 ; Q402.1@3979,7136 3996,7153 4012,7153 4017,7148 ; Q402.1@3981,7123 4026,7123 ; Q402.1@3982,7144 4021,7144 ; Q402.1@3984,7117 4024,7117 ; Q402.1@3985,7106 4030,7106 ; Q402.1@3985,7116 4024,7116 ; Q402.1@3988,7129 4026,7129 ; 4019,7148 4028,7139 4028,7112
UnNamedNet32: Q419.1 R503.1 R519.2 | length 1087
  TopLayer w12: Q419.1@3975,6670 R503.1@3975,6740
  BottomLayer w7: R519.2@3599,6204 3630,6204 3640,6214 3762,6214 3911,6363 3996,6363 4056,6423 4056,6625 4035,6646 ; Q419.1@3976,6646 4035,6646 ; Q419.1@3978,6692 4024,6692 4035,6681 4035,6646 ; Q419.1@3985,6688 4024,6688 ; Q419.1@3986,6685 4029,6685
UnNamedNet33: C192.1 C193.2 | length 180.9
  TopLayer w12: C192.1@2540,10254 2540,10218 2617,10141 C193.2@2617,10105
UnNamedNet34: C135.1 C192.2 F100.1 F101.1 J105.4 | length 1725.7
  TopLayer w12: 2434,9510 2436,9512 2436,9684 2490,9738 2625,9738 2746,9859 2746,9955 2765,9974 2765,10060 2765,10125
  TopLayer w28: J105.4@2362,9488 2412,9488 2434,9510
  MidLayer4 w7: J105.4@2362,9488 J105.4@2387,9488
  MidLayer4 w14: J105.4@2387,9488 2430,9531 2430,9602 2557,9729 2557,10100 2557,10131 2610,10184
  other v1: 3077,10247 3038,10249 3161,10250 3204,10254 2903,10259 2811,10261 3116,10266 2794,10305 2921,10305 2813,10349 2902,10350 2859,10431 2648,10432 2677,10432 2738,10432 2799,10432 2919,10432 2979,10432 3009,10432 2860,10461 2649,10462 2678,10462 2739,10462 2800,10462 2920,10462 2980,10462 3010,10462 2662,10503 2934,10503 3019,10503 2747,10504 2841,10504 2663,10533 2935,10533 3020,10533 2748,10534 2842,10534 2662,10583 2841,10583 2935,10583 2747,10584 3020,10584 2662,10614 2841,10614 2935,10614 2747,10615 3020,10615 2662,10642 2841,10642 2935,10642 2747,10643 3020,10643 2662,10672 2841,10672 2935,10672 2747,10673 3020,10673 2662,10702 2841,10702 2935,10702 2747,10703 3020,10703 2663,10731 2842,10731 2936,10731 2748,10732 3021,10732
UnNamedNet35: C223.2 C227.2 | length 145
  TopLayer w15: C227.2@2615,9857 C223.2@2615,10002
UnNamedNet36: C242.2 C243.1